# Altium PCB LQ_extend.PcbDoc
Units mil, origin at the board's own origin, x right, y up, seen from the top; angles counter-clockwise.
Board outline 6000 x 4000 mil, 2 copper layers (Top Layer, Bottom Layer); 1 components, 0 nets, 84 pads, 0 vias.
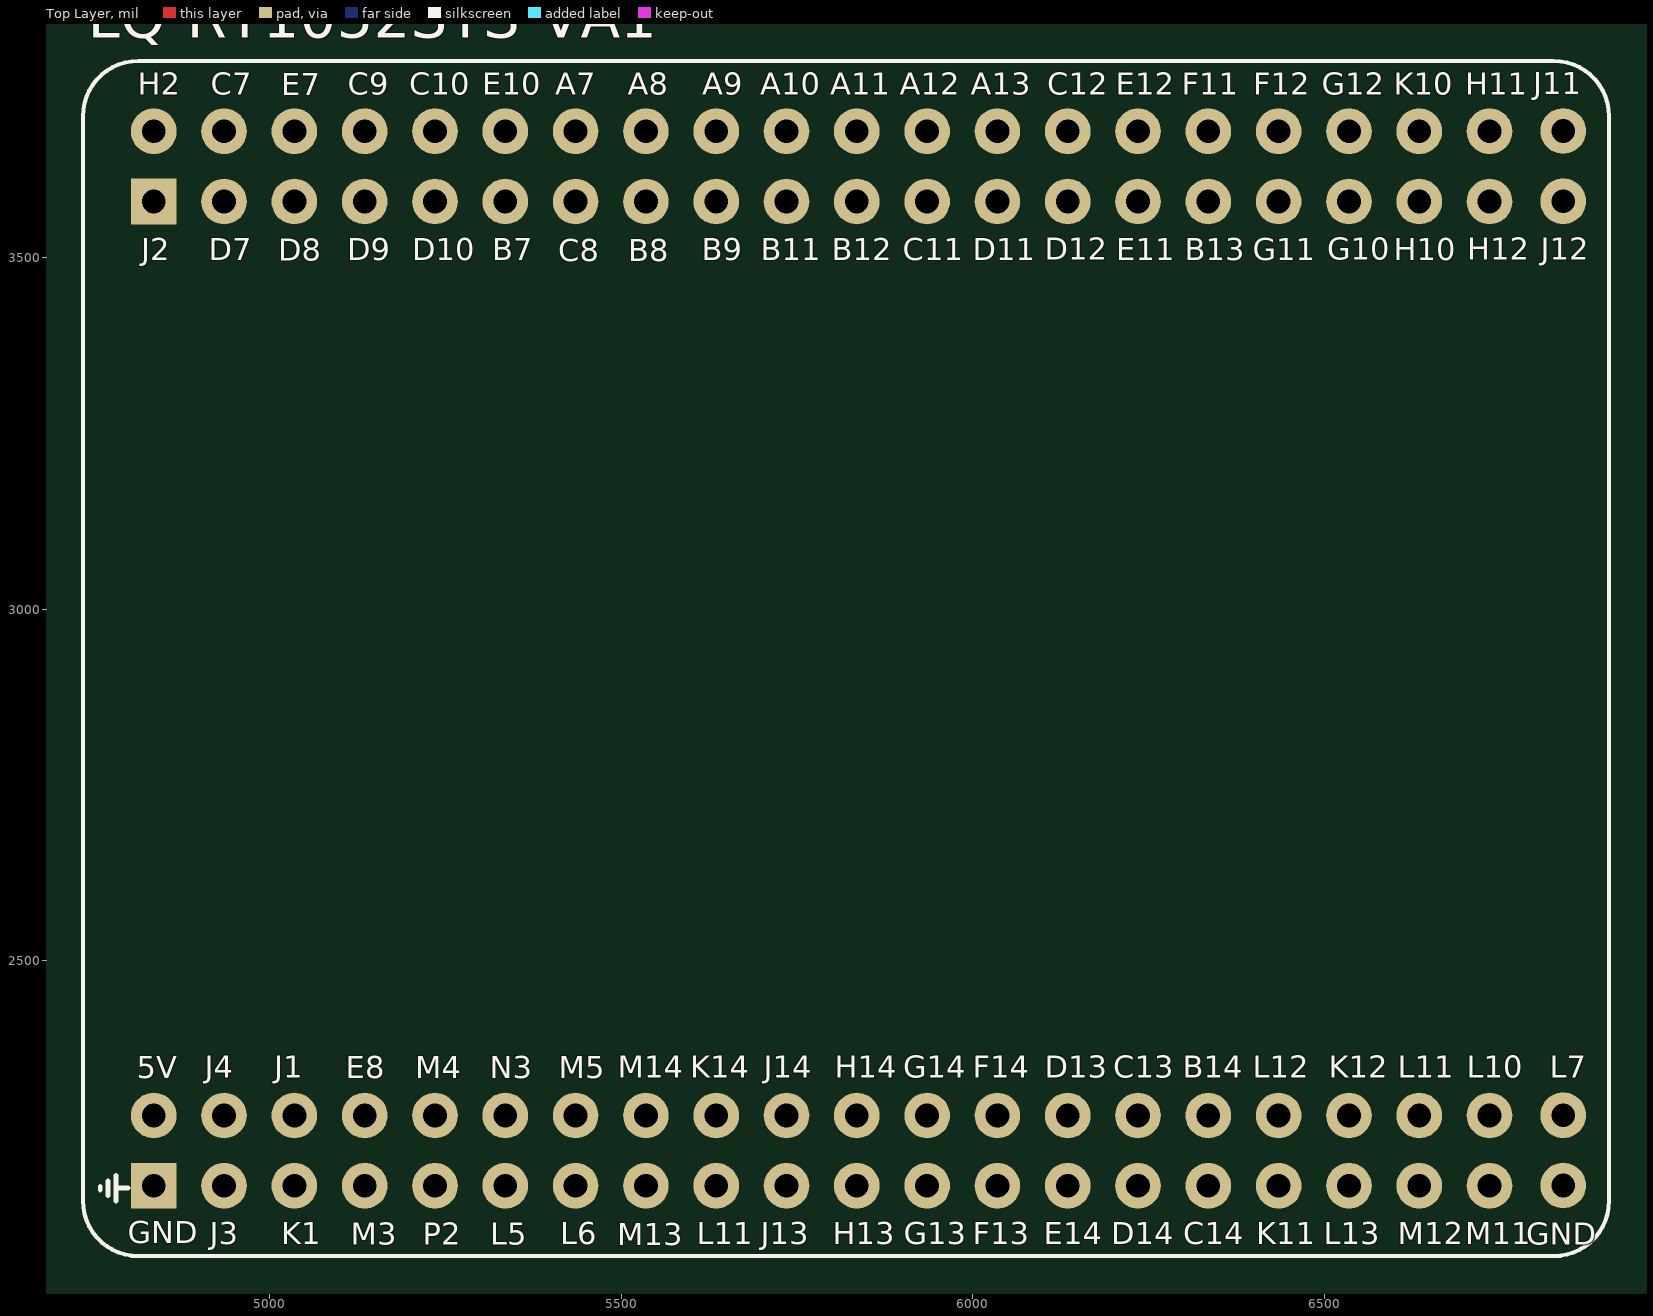
[diagram p0: Top Layer view]
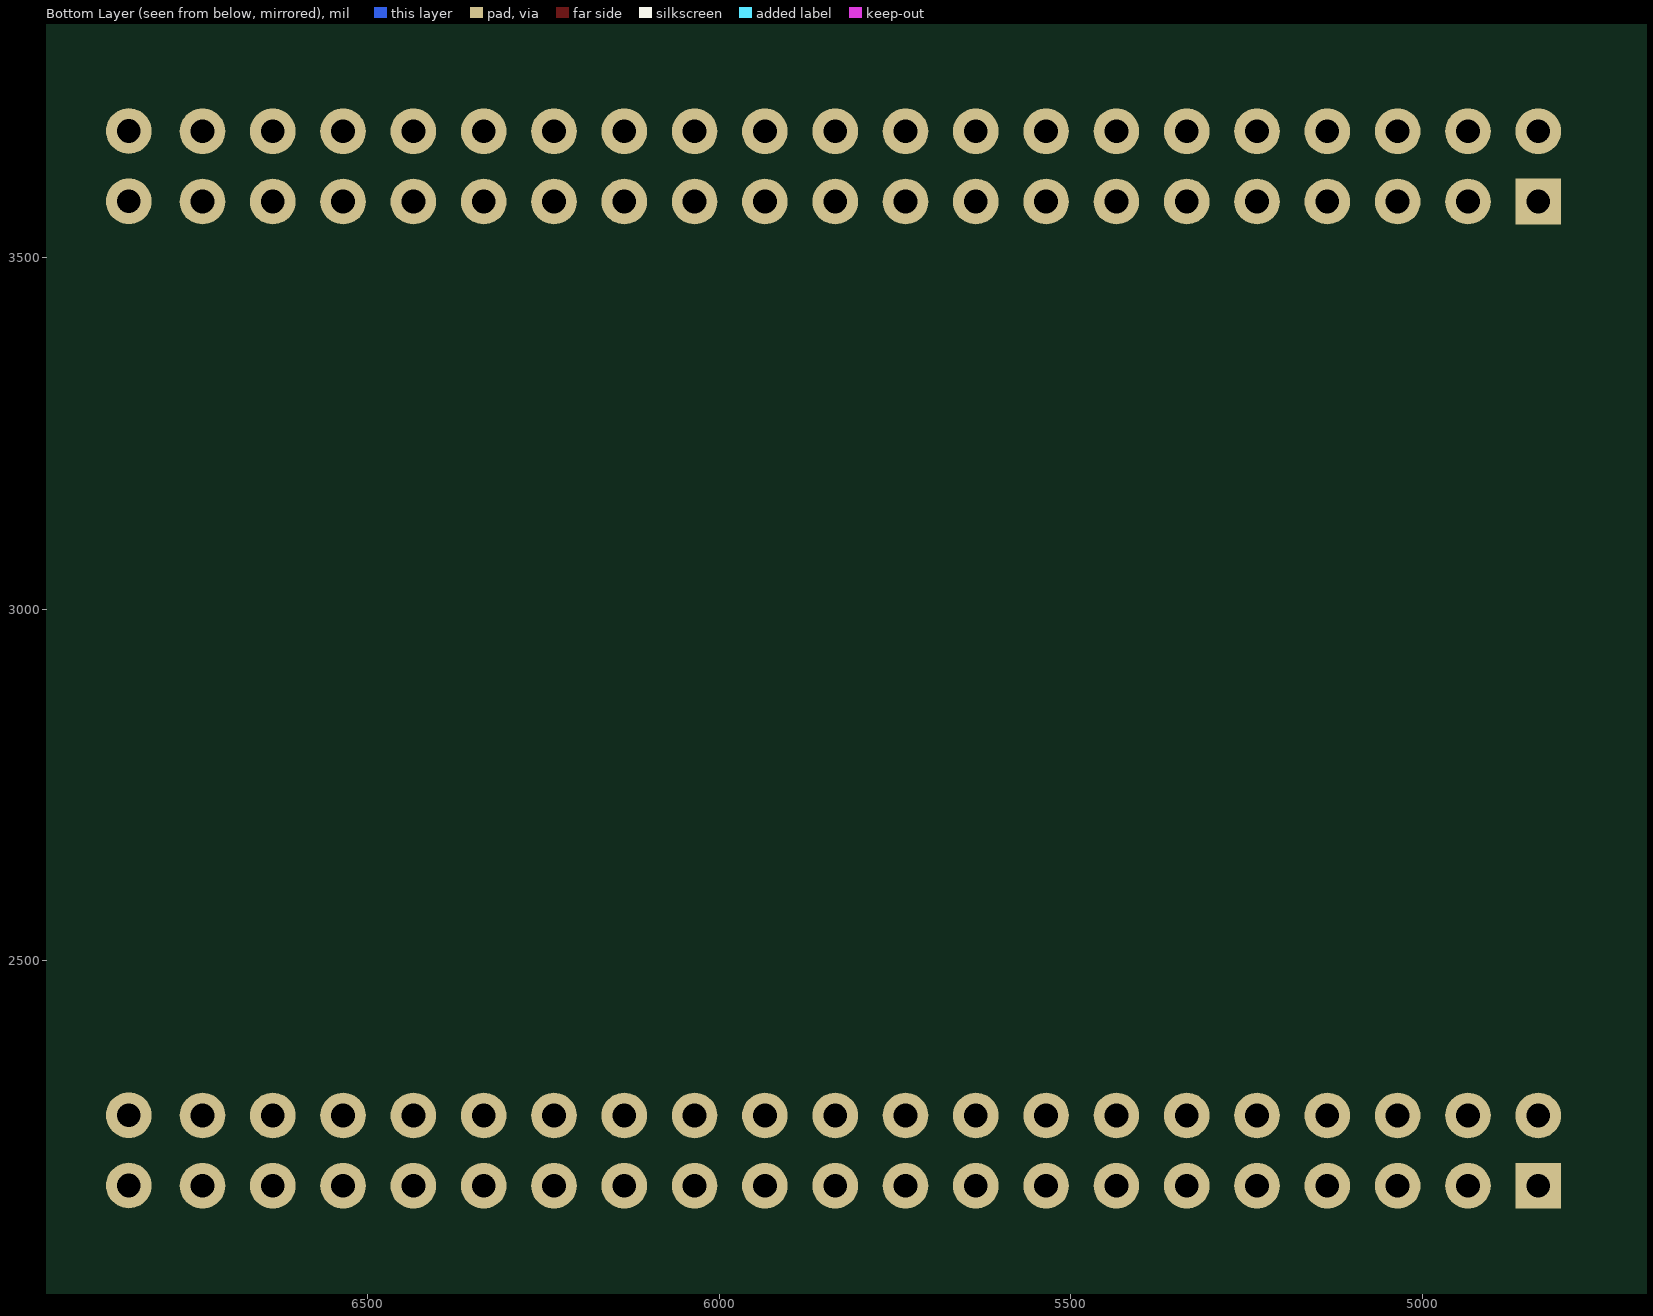
[diagram p1: Bottom Layer view, seen from below]

## Layer stack, top to bottom
Top Solder: solder mask 0.4, Solder Resist, Dk 3.5
Top Layer: signal copper 1.4
Dielectric 1: dielectric 12.6, FR-4, Dk 4.8
Bottom Layer: signal copper 1.4
Bottom Solder: solder mask 0.4, Solder Resist, Dk 3.5

## Board outline
1000,1000 7000,1000 7000,5000 1000,5000

## Design rules (kind name [scope] priority, off if disabled: settings)
Clearance [All] p1: gap=10 ignorepadtopadclearanceinfootprint=FALSE except(0: Arc-Hole Track-Hole SMDPad-Hole THPad-Hole Via-Hole Fill-Hole Poly-Hole Region-Hole Text-Hole)
PolygonConnect [All] p1: connectstyle=Relief reliefconductorwidth=10 reliefentries=4 polygonreliefangle="90 Angle" airgapwidth=10
RoomDefinition LQ_extend [InComponentClass('LQ_extend')] p1: confinementstyle=ConfineIn formatcopy=TRUE lockcomponents=FALSE outline 6915,2075 6915,3905 4715,3905 4715,2075
RoutingVias [All] p1: holewidth=28 width=50 viastyle="Through Hole" minholewidth=28 minwidth=50 maxholewidth=28 maxwidth=50
SolderMaskExpansion [All] p1: expansion=4 istentingtop=FALSE
Width [All] p1: maxlimit=10 minlimit=10 preferedwidth=10
30 further rules are at their usual default settings.

## Components (designator, comment, footprint, x,y, rotation, side; value= is the part's Value field where it differs from the comment)
LQ-RT1052SYS-VA1 "LQ-RT1052SYS-VA1" LQ-RT1052SYS-VA1 5785,2930 r0 top

## Footprints (in the part's own frame and the unit in brackets; to place one, negate y for a bottom-side part, rotate by r counter-clockwise, add the part's x,y. Pads: shape width x height; smd on the part's side, far side on the other; paste and mask are expansions set on the pad)
LQ-RT1052SYS-VA1 [mm]
  rect 1.65x1.65 hole 0.86: 1(-24.13,-19.05) 43(-24.13,16.51)
  round 1.65 hole 0.86: 2(-24.13,-16.51) 3(-21.59,-19.05) 4(-21.59,-16.51) 5(-19.05,-19.05) 6(-19.05,-16.51) 7(-16.51,-19.05) 8(-16.51,-16.51) 9(-13.97,-19.05) 10(-13.97,-16.51) 11(-11.43,-19.05) 12(-11.43,-16.51) 13(-8.89,-19.05) 14(-8.89,-16.51) 15(-6.35,-19.05) 16(-6.35,-16.51) 17(-3.81,-19.05) 18(-3.81,-16.51) 19(-1.27,-19.05) 20(-1.27,-16.51) 21(1.27,-19.05) 22(1.27,-16.51) 23(3.81,-19.05) 24(3.81,-16.51) 25(6.35,-19.05) 26(6.35,-16.51) 27(8.89,-19.05) 28(8.89,-16.51) 29(11.43,-19.05) 30(11.43,-16.51) 31(13.97,-19.05) 32(13.97,-16.51) 33(16.51,-19.05) 34(16.51,-16.51) 35(19.05,-19.05) 36(19.05,-16.51) 37(21.59,-19.05) 38(21.59,-16.51) 39(24.13,-19.05) 40(24.13,-16.51) 41(26.79,-19.04) 42(26.79,-16.5) 44(-24.13,19.05) 45(-21.59,16.51) 46(-21.59,19.05) 47(-19.05,16.51) 48(-19.05,19.05) 49(-16.51,16.51) 50(-16.51,19.05) 51(-13.97,16.51) 52(-13.97,19.05) 53(-11.43,16.51) 54(-11.43,19.05) 55(-8.89,16.51) 56(-8.89,19.05) 57(-6.35,16.51) 58(-6.35,19.05) 59(-3.81,16.51) 60(-3.81,19.05) 61(-1.27,16.51) 62(-1.27,19.05) 63(1.27,16.51) 64(1.27,19.05) 65(3.81,16.51) 66(3.81,19.05) 67(6.35,16.51) 68(6.35,19.05) 69(8.89,16.51) 70(8.89,19.05) 71(11.43,16.51) 72(11.43,19.05) 73(13.97,16.51) 74(13.97,19.05) 75(16.51,16.51) 76(16.51,19.05) 77(19.05,16.51) 78(19.05,19.05) 79(21.59,16.51) 80(21.59,19.05) 81(24.13,16.51) 82(24.13,19.05) 83(26.79,16.52) 84(26.79,19.06)
  silkscreen extent -26.69,-21.59 28.45,21.59

## Nets (pads, with @x,y where several pads share a name; then routed paths per layer and width w, separated by ;. In a path a pad name is that pad's centre, name@x,y a point inside that pad or via, vN(x,y) a via of type N, cw(c..) or ccw(c..) an arc to the next point about the centre after c; other vN are vias at no path point)
pads on no net: LQ-RT1052SYS-VA1.1 LQ-RT1052SYS-VA1.2 LQ-RT1052SYS-VA1.3 LQ-RT1052SYS-VA1.4 LQ-RT1052SYS-VA1.5 LQ-RT1052SYS-VA1.6 LQ-RT1052SYS-VA1.7 LQ-RT1052SYS-VA1.8 LQ-RT1052SYS-VA1.9 LQ-RT1052SYS-VA1.10 LQ-RT1052SYS-VA1.11 LQ-RT1052SYS-VA1.12 LQ-RT1052SYS-VA1.13 LQ-RT1052SYS-VA1.14 LQ-RT1052SYS-VA1.15 LQ-RT1052SYS-VA1.16 LQ-RT1052SYS-VA1.17 LQ-RT1052SYS-VA1.18 LQ-RT1052SYS-VA1.19 LQ-RT1052SYS-VA1.20 LQ-RT1052SYS-VA1.21 LQ-RT1052SYS-VA1.22 LQ-RT1052SYS-VA1.23 LQ-RT1052SYS-VA1.24 LQ-RT1052SYS-VA1.25 LQ-RT1052SYS-VA1.26 LQ-RT1052SYS-VA1.27 LQ-RT1052SYS-VA1.28 LQ-RT1052SYS-VA1.29 LQ-RT1052SYS-VA1.30 LQ-RT1052SYS-VA1.31 LQ-RT1052SYS-VA1.32 LQ-RT1052SYS-VA1.33 LQ-RT1052SYS-VA1.34 LQ-RT1052SYS-VA1.35 LQ-RT1052SYS-VA1.36 LQ-RT1052SYS-VA1.37 LQ-RT1052SYS-VA1.38 LQ-RT1052SYS-VA1.39 LQ-RT1052SYS-VA1.40 LQ-RT1052SYS-VA1.41 LQ-RT1052SYS-VA1.42 LQ-RT1052SYS-VA1.43 LQ-RT1052SYS-VA1.44 LQ-RT1052SYS-VA1.45 LQ-RT1052SYS-VA1.46 LQ-RT1052SYS-VA1.47 LQ-RT1052SYS-VA1.48 LQ-RT1052SYS-VA1.49 LQ-RT1052SYS-VA1.50 LQ-RT1052SYS-VA1.51 LQ-RT1052SYS-VA1.52 LQ-RT1052SYS-VA1.53 LQ-RT1052SYS-VA1.54 LQ-RT1052SYS-VA1.55 LQ-RT1052SYS-VA1.56 LQ-RT1052SYS-VA1.57 LQ-RT1052SYS-VA1.58 LQ-RT1052SYS-VA1.59 LQ-RT1052SYS-VA1.60 LQ-RT1052SYS-VA1.61 LQ-RT1052SYS-VA1.62 LQ-RT1052SYS-VA1.63 LQ-RT1052SYS-VA1.64 LQ-RT1052SYS-VA1.65 LQ-RT1052SYS-VA1.66 LQ-RT1052SYS-VA1.67 LQ-RT1052SYS-VA1.68 LQ-RT1052SYS-VA1.69 LQ-RT1052SYS-VA1.70 LQ-RT1052SYS-VA1.71 LQ-RT1052SYS-VA1.72 LQ-RT1052SYS-VA1.73 LQ-RT1052SYS-VA1.74 LQ-RT1052SYS-VA1.75 LQ-RT1052SYS-VA1.76 LQ-RT1052SYS-VA1.77 LQ-RT1052SYS-VA1.78 LQ-RT1052SYS-VA1.79 LQ-RT1052SYS-VA1.80 LQ-RT1052SYS-VA1.81 LQ-RT1052SYS-VA1.82 LQ-RT1052SYS-VA1.83 LQ-RT1052SYS-VA1.84

## Text inside footprints (layer, text, board x,y; h text height)
LQ-RT1052SYS-VA1: Top Overlay "H2" at 4811.95,3731.95 h31.5; Top Overlay "J2" at 4817.09,3496.73 h31.5; Top Overlay "J1" at 5006.44,2333.72 h31.5; Top Overlay "J3" at 4914.56,2096.82 h31.5; Top Overlay "K1" at 5016.56,2096.82 h31.5; Top Overlay "J4" at 4907.52,2333.72 h31.5; Top Overlay "D7" at 4913.23,3496.77 h31.5; Top Overlay "E7" at 5016.1,3731.18 h31.5; Top Overlay "C7" at 4916.38,3731.97 h31.5; Top Overlay "L12" at 6398.05,2333.72 h31.5; Top Overlay "K12" at 6506.34,2333.72 h31.5; Top Overlay "K11" at 6402.97,2096.82 h31.5; Top Overlay "L13" at 6498.97,2096.82 h31.5; Top Overlay "A11" at 5797.35,3731.97 h31.5; Top Overlay "GND" at 4798.07,2098 h31.5; Top Overlay "5V" at 4810.59,2333.15 h31.5; Top Overlay "C11" at 5900.69,3496.77 h31.5; Top Overlay "D12" at 6102.32,3496.93 h31.5; Top Overlay "G10" at 6504.09,3497.32 h31.5; Top Overlay "H10" at 6598.78,3496.73 h31.5; Top Overlay "D11" at 5999.69,3496.77 h31.5; Top Overlay "E11" at 6203.69,3496.77 h31.5; Top Overlay "B8" at 5510,3495 h31.5; Top Overlay "B12" at 5799.69,3496.77 h31.5; Top Overlay "B11" at 5698.69,3496.77 h31.5; Top Overlay "D10" at 5202.69,3496.77 h31.5; Top Overlay "B9" at 5614.69,3496.77 h31.5; Top Overlay "C8" at 5410,3495 h31.5; Top Overlay "B7" at 5316.69,3496.77 h31.5; Top Overlay "F12" at 6398.78,3732.17 h31.5; Top Overlay "F11" at 6297.4,3731.97 h31.5; Top Overlay "D9" at 5110.47,3496.77 h31.5; Top Overlay "D8" at 5011.97,3495.75 h31.5; Top Overlay "A13" at 5997.35,3731.97 h31.5; Top Overlay "E12" at 6203.35,3731.97 h31.5; Top Overlay "K10" at 6598.78,3731.97 h31.5; Top Overlay "H11" at 6700.35,3731.97 h31.5; Top Overlay "C12" at 6105.55,3731.97 h31.5; Top Overlay "G12" at 6496.42,3731.97 h31.5; Top Overlay "A8" at 5509.35,3731.97 h31.5; Top Overlay "A12" at 5896.35,3731.97 h31.5; Top Overlay "E10" at 5302.35,3731.97 h31.5; Top Overlay "A10" at 5697.35,3731.97 h31.5; Top Overlay "A9" at 5615.35,3731.97 h31.5; Top Overlay "A7" at 5406.35,3731.97 h31.5; Top Overlay "C10" at 5198.35,3731.97 h31.5; Top Overlay "G11" at 6398.27,3496.77 h31.5; Top Overlay "B13" at 6301.34,3496.73 h31.5; Top Overlay "C9" at 5110.65,3731.97 h31.5; Top Overlay "E8" at 5108.31,2333.13 h31.5; Top Overlay "M5" at 5411.23,2333.13 h31.5; Top Overlay "K14" at 5597.8,2333.72 h31.5; Top Overlay "L10" at 6702.8,2333.72 h31.5; Top Overlay "N3" at 5313.23,2333.13 h31.5; Top Overlay "J14" at 5702.31,2333.72 h31.5; Top Overlay "L11" at 6604.76,2333.72 h31.5; Top Overlay "M14" at 5494.8,2333.72 h31.5; Top Overlay "D13" at 6102.12,2333.74 h31.5; Top Overlay "G14" at 5900.74,2333.72 h31.5; Top Overlay "B14" at 6298.74,2333.72 h31.5; Top Overlay "C13" at 6199.74,2333.72 h31.5; Top Overlay "F14" at 5999.74,2333.72 h31.5; Top Overlay "H14" at 5803.74,2333.72 h31.5; Top Overlay "H13" at 5800.61,2096.82 h31.5; Top Overlay "F13" at 5999.61,2096.82 h31.5; Top Overlay "D14" at 6196.61,2096.82 h31.5; Top Overlay "C14" at 6299.61,2096.82 h31.5; Top Overlay "G13" at 5901.61,2096.82 h31.5; Top Overlay "E14" at 6100.61,2096.82 h31.5; Top Overlay "L6" at 5413.02,2096.82 h31.5; Top Overlay "M12" at 6604.76,2096.82 h31.5; Top Overlay "J13" at 5698.02,2096.82 h31.5; Top Overlay "L5" at 5313.35,2096.23 h31.5; Top Overlay "L11" at 5607.44,2096.82 h31.5; Top Overlay "M13" at 5494.45,2095.75 h31.5; Top Overlay "P2" at 5217.35,2096.23 h31.5; Top Overlay "M3" at 5115.35,2096.23 h31.5; Top Overlay "H12" at 6703.31,3497.13 h31.5; Top Overlay "M4" at 5207.23,2333.13 h31.5; Top Overlay "M11" at 6700.24,2096.82 h31.5; Top Overlay "GND" at 6787.36,2096.14 h31.5; Top Overlay "J12" at 6808.03,3497.52 h31.5; Top Overlay "L7" at 6820.83,2333.94 h31.5; Top Overlay "J11" at 6797.38,3732.36 h31.5